# EAGLE board ME 433 round 2 (EAGLE 5.12)
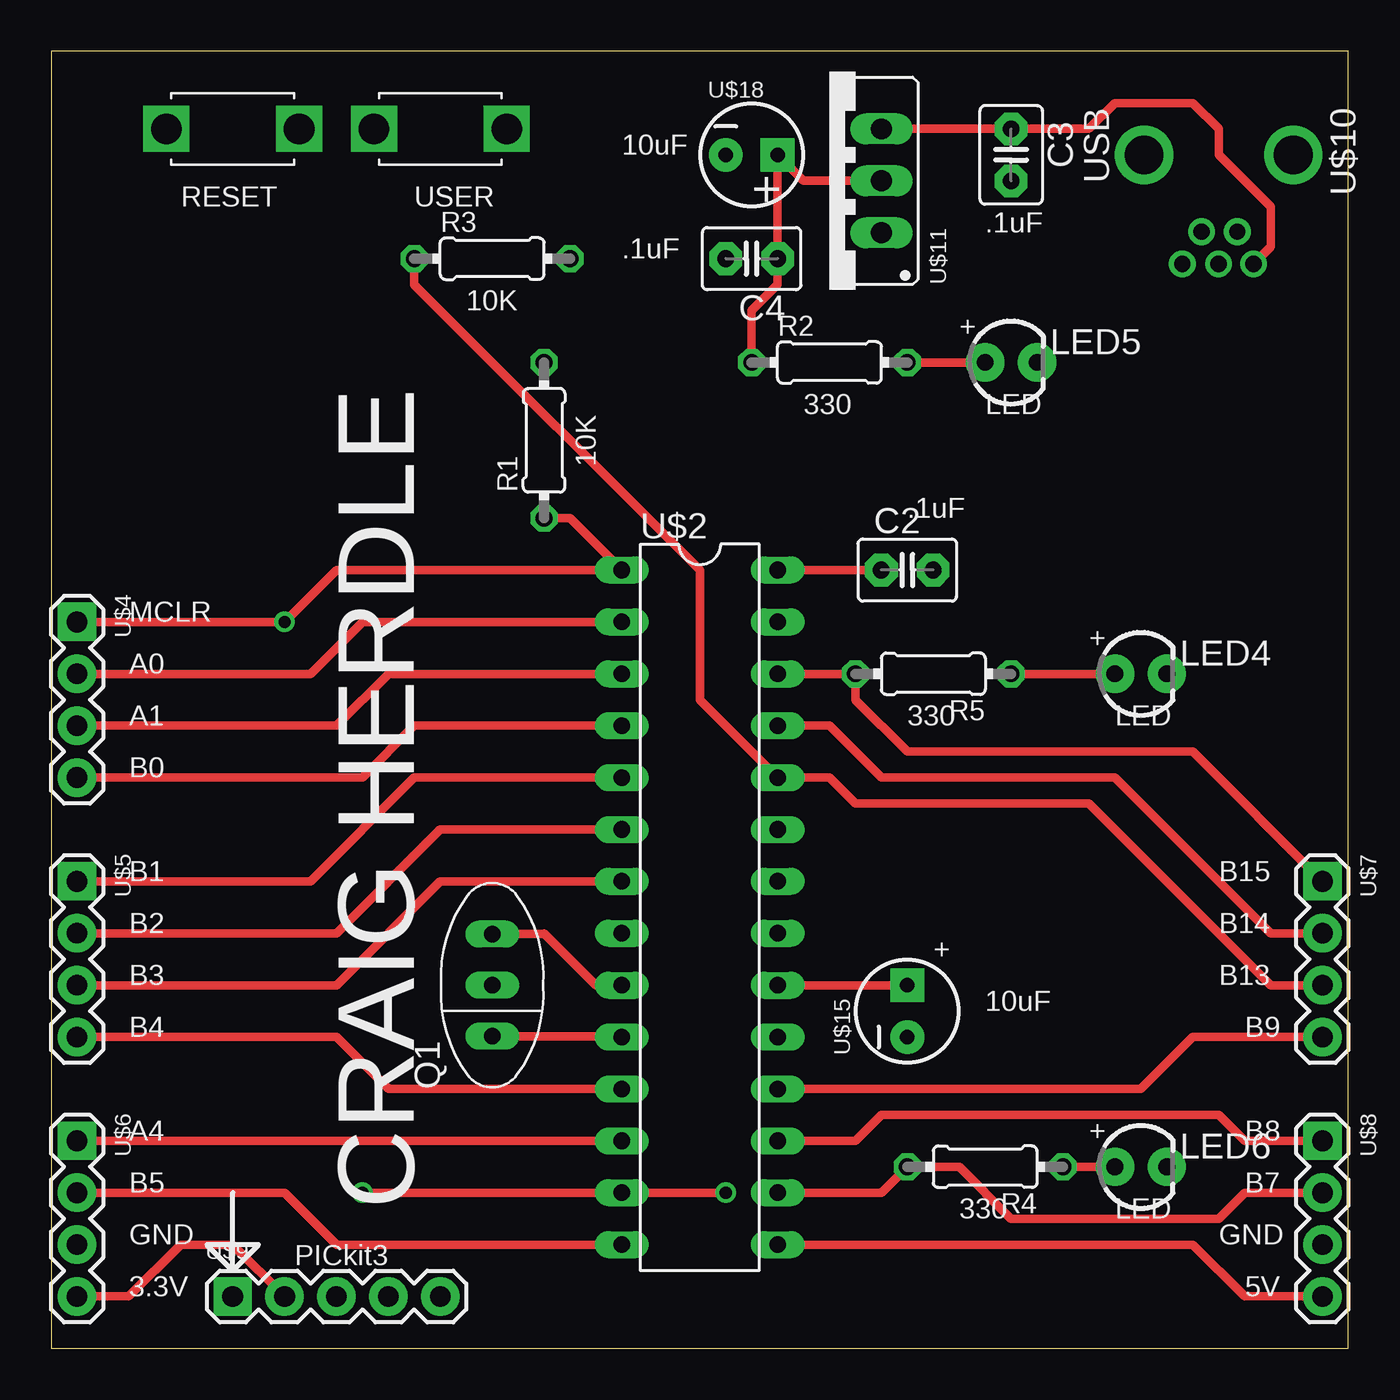
[diagram p0: board, top side]
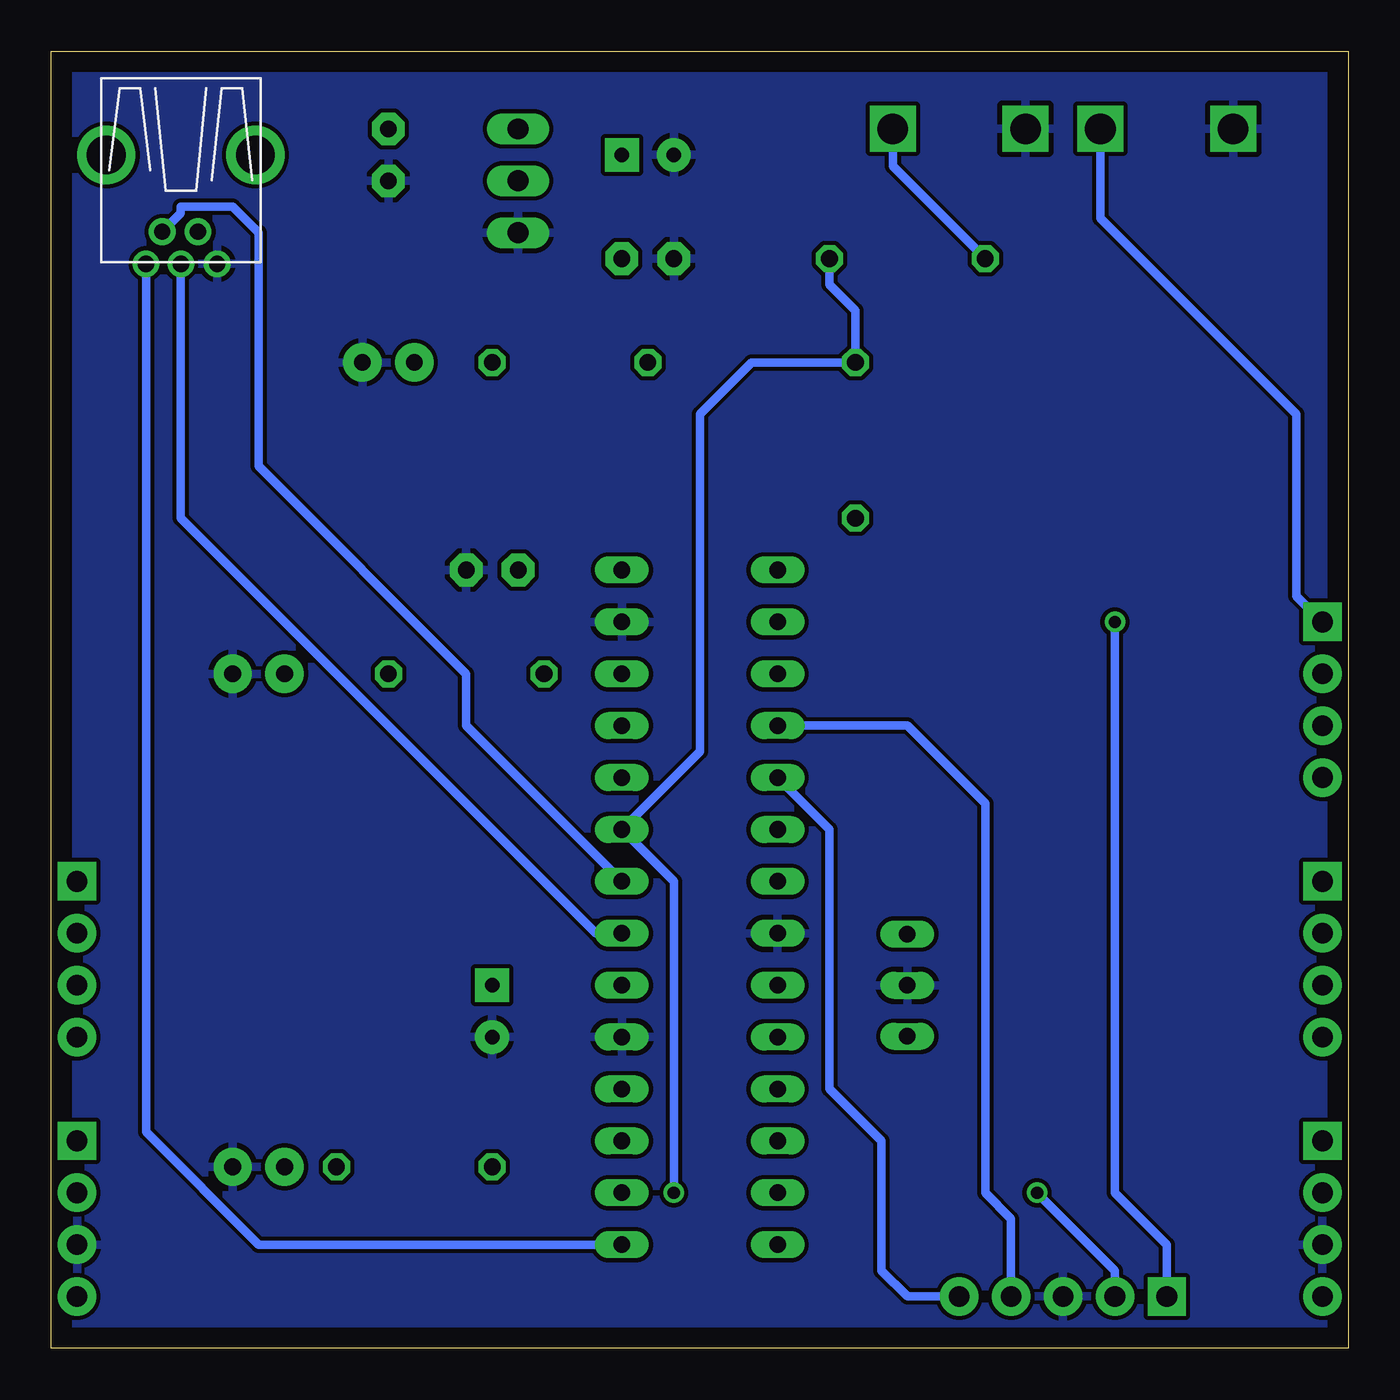
[diagram p1: board, bottom side, seen from below]

Size 63.5 x 63.5 mm. Coordinates in mm from the lower left corner, seen from the top.
Outline: 0,0 63.5,0 63.5,63.5 0,63.5 0,0
Copper layers (1*16): Top 0.035mm / dielectric 1.5mm / Bottom 0.035mm
Design rules "default": minimum track width 10mil, minimum drill 24mil, track to track 8mil, track to pad 8mil, pad to pad 8mil, via to via 8mil, smd to smd 8mil, copper to edge 40mil, drill to drill 8mil, minimum pad ring 10mil, minimum via ring 8mil, stop-mask expansion 4mil, vias tented up to drill 0mil, thermal gap 10mil

## Footprints (pad centres in the part's own frame; a part is rotated, then mirrored left to right if it is on the bottom)
C2.5-3 = drill 0.813 pad 1.6 octagon: 1 -1.27,0; 2 1.27,0
LED3MM = drill 0.813 pad 1.88 round: A -1.27,0; K 1.27,0
CSTLA_T = drill 0.813 long: 1 -2.5,0; 2 0,0; 3 2.5,0
0204/7 = drill 0.813 octagon: 1 -3.81,0; 2 3.81,0
DIL28-3 = drill 0.813 long: 1 -16.51,-3.81; 2 -13.97,-3.81; 3 -11.43,-3.81; 4 -8.89,-3.81; 5 -6.35,-3.81; 6 -3.81,-3.81; 7 -1.27,-3.81; 8 1.27,-3.81; 9 3.81,-3.81; 10 6.35,-3.81; 11 8.89,-3.81; 12 11.43,-3.81; 13 13.97,-3.81; 14 16.51,-3.81; 15 16.51,3.81; 16 13.97,3.81; 17 11.43,3.81; 18 8.89,3.81; 19 6.35,3.81; 20 3.81,3.81; 21 1.27,3.81; 22 -1.27,3.81; 23 -3.81,3.81; 24 -6.35,3.81; 25 -8.89,3.81; 26 -11.43,3.81; 27 -13.97,3.81; 28 -16.51,3.81
TACTILE_SWITCH = drill 1.5 square: 1 -3.25,0; 2 3.25,0
1X04 = drill 1.016 pad 1.88 square: 1 0,0 | drill 1.016 pad 1.88 round: 2 2.54,0; 3 5.08,0; 4 7.62,0
1X05 = drill 1.016 pad 1.88 square: 1 0,0 | drill 1.016 pad 1.88 round: 2 2.54,0; 3 5.08,0; 4 7.62,0; 5 10.16,0
USB-MINIB = drill 0.8 round: D+ 4.064,0; D- 2.489,0.914; GND 4.064,-1.778; ID 2.489,-0.838; VBUS 4.064,1.702 | drill 1.9 round: P$6 -1.27,-3.65; P$7 -1.27,3.65
TO220 = drill 1.016 long: 1 -2.54,0; 2 0,0; 3 2.54,0
CAP_POL_D = drill 0.7 pad 1.651 square: 1 1.27,0 | drill 0.7 pad 1.651 round: 2 -1.27,0

## Placement (x,y rotation side)
C2  .1uF  [C2.5-3]  41.91,38.1 0 top
C3  .1uF  [C2.5-3]  46.99,58.42 270 top
C4  .1uF  [C2.5-3]  34.29,53.34 180 top
LED4  [LED3MM]  53.34,33.02 0 top
LED5  [LED3MM]  46.99,48.26 0 top
LED6  [LED3MM]  53.34,8.89 0 top
Q1  [CSTLA_T]  21.59,17.78 90 top
R1  10K  [0204/7]  24.13,44.45 90 top
R2  [0204/7]  38.1,48.26 0 top
R3  10K  [0204/7]  21.59,53.34 0 top
R4  330  [0204/7]  45.72,8.89 180 top
R5  330  [0204/7]  43.18,33.02 180 top
U$2  PIC32MX250F128BPIC32MX250F128B  [DIL28-3]  31.75,21.59 270 top
U$3  TACTILE_SWITCH  [TACTILE_SWITCH]  8.89,59.69 0 top
U$4  1X04_HEADER  [1X04]  1.27,35.56 270 top
U$5  1X04_HEADER  [1X04]  1.27,22.86 270 top
U$6  1X04_HEADER  [1X04]  1.27,10.16 270 top
U$7  1X04_HEADER  [1X04]  62.23,22.86 270 top
U$8  1X04_HEADER  [1X04]  62.23,10.16 270 top
U$9  1X05_HEADER  [1X05]  8.89,2.54 0 top
U$10  USB  [USB-MINIB]  57.15,57.15 270 top
U$11  LD1117  [TO220]  40.64,57.15 90 top
U$12  TACTILE_SWITCH  [TACTILE_SWITCH]  19.05,59.69 0 top
U$15  10uF  [CAP_POL_D]  41.91,16.51 90 top
U$18  10uF  [CAP_POL_D]  34.29,58.42 0 top

## Library data of the parts
C2-C4 = capacitor-wima
LED4-LED6 = Gibbot v4
Q1 = murata-resonators
R1-R5 U$2 U$3 U$12 = CraigsFirstLibrary
U$4-U$11 U$15 U$18 = ME433 (1)

## Nets
3.3V: R1.2 R3.2 U$2.13 U$2.23 U$6.4 U$9.2
5V: C3.1 U$2.15 U$8.4 U$10.VBUS U$11.3
A0: U$2.2 U$4.2
A1: U$2.3 U$4.3
A4: U$2.12 U$6.1
B0: U$2.4 U$4.4 U$9.4
B1: U$2.5 U$5.1 U$9.5
B2: U$2.6 U$5.2
B3: U$2.7 U$5.3
B4: U$2.11 U$5.4
B5: U$2.14 U$6.2
B7: R4.2 U$2.16 U$8.2
B8: U$2.17 U$8.1
B9: U$2.18 U$7.4
B13: R3.1 U$2.24 U$7.3 U$12.2
B14: U$2.25 U$7.2
B15: R5.2 U$2.26 U$7.1
D+: U$2.21 U$10.D+
D-: U$2.22 U$10.D-
GND: C2.2 C3.2 C4.2 LED4.K LED5.K LED6.K Q1.2 U$2.8 U$2.19 U$2.27 U$3.1 U$6.3 U$8.3 U$9.3 U$10.GND U$11.1 U$12.1 U$15.2 U$18.2
MCLR: R1.1 U$2.1 U$3.2 U$4.1 U$9.1
N$1: LED5.A R2.2
N$2: LED4.A R5.1
N$3: LED6.A R4.1
N$14: C2.1 U$2.28
N$22: U$2.20 U$15.1
N$57: C4.1 R2.1 U$11.2 U$18.1
OSC1: Q1.3 U$2.9
OSC2: Q1.1 U$2.10

## Tracks (layer width: path | path; a pad name or v marks a point on that pad's centre or on a via)
3.3V  (via drill 0.6)
  Top 0.406: U$6.4 3.81,2.54 6.35,5.08 8.89,5.08 U$9.2 | v15.24,7.62 U$2.13 v33.02,7.62
  Bottom 0.406: U$9.2 11.43,3.81 v15.24,7.62 | v33.02,7.62 33.02,22.86 U$2.23 31.75,29.21 31.75,45.72 29.21,48.26 R1.2 24.13,50.8 25.4,52.07 R3.2
5V
  Top 0.406: U$2.15 55.88,5.08 58.42,2.54 U$8.4 | U$11.3 C3.1 50.8,59.69 52.07,60.96 55.88,60.96 57.15,59.69 57.15,58.42 59.69,55.88 59.69,53.92 U$10.VBUS
  Bottom 0.406: U$10.VBUS 58.85,10.59 53.34,5.08 U$2.15
A0
  Top 0.406: U$2.2 15.24,35.56 12.7,33.02 U$4.2
A1
  Top 0.406: U$2.3 16.51,33.02 13.97,30.48 U$4.3
A4
  Top 0.406: U$6.1 U$2.12
B0
  Top 0.406: U$4.4 15.24,27.94 17.78,30.48 U$2.4
  Bottom 0.406: U$9.4 16.51,6.35 17.78,7.62 17.78,26.67 21.59,30.48 U$2.4
B1
  Top 0.406: U$2.5 17.78,27.94 12.7,22.86 U$5.1
  Bottom 0.406: U$9.5 21.59,2.54 22.86,3.81 22.86,10.16 25.4,12.7 25.4,25.4 U$2.5
B2
  Top 0.406: U$5.2 13.97,20.32 19.05,25.4 U$2.6
B3
  Top 0.406: U$5.3 13.97,17.78 19.05,22.86 U$2.7
B4
  Top 0.406: U$5.4 13.97,15.24 16.51,12.7 U$2.11
B5
  Top 0.406: U$6.2 11.43,7.62 13.97,5.08 U$2.14
B7
  Top 0.406: U$2.16 40.64,7.62 R4.2 44.45,8.89 46.99,6.35 57.15,6.35 58.42,7.62 U$8.2
B8
  Top 0.406: U$2.17 39.37,10.16 40.64,11.43 57.15,11.43 58.42,10.16 U$8.1
B9
  Top 0.406: U$2.18 53.34,12.7 55.88,15.24 U$7.4
B13
  Top 0.406: U$7.3 59.69,17.78 50.8,26.67 39.37,26.67 38.1,27.94 U$2.24 31.75,31.75 31.75,38.1 17.78,52.07 R3.1
  Bottom 0.406: U$12.2 22.3,57.86 R3.1
B14
  Top 0.406: U$2.25 38.1,30.48 40.64,27.94 52.07,27.94 59.69,20.32 U$7.2
B15
  Top 0.406: U$2.26 R5.2 39.37,31.75 41.91,29.21 55.88,29.21 U$7.1
D+
  Bottom 0.406: U$2.21 36.83,20.32 57.15,40.64 U$10.D+
D-
  Bottom 0.406: U$2.22 43.18,30.48 43.18,33.02 53.34,43.18 53.34,54.61 54.61,55.88 57.15,55.88 57.15,55.58 U$10.D-
GND
  pour Bottom: -2.54,66.04 68.58,66.04 68.58,-2.54 -2.54,-2.54
MCLR  (via drill 0.6)
  Top 0.406: U$4.1 v11.43,35.56 13.97,38.1 U$2.1 25.4,40.64 R1.1
  Bottom 0.406: U$9.1 8.89,5.08 11.43,7.62 v11.43,35.56 | U$3.2 12.14,55.32 2.54,45.72 2.54,36.83 U$4.1
N$1
  Top 0.406: R2.2 LED5.A
N$2
  Top 0.406: R5.1 LED4.A
N$3
  Top 0.406: R4.1 LED6.A
N$14
  Top 0.406: U$2.28 C2.1
N$22
  Top 0.406: U$2.20 U$15.1
N$57
  Top 0.406: U$11.2 36.83,57.15 U$18.1 C4.1 35.56,52.07 34.29,50.8 R2.1
OSC1
  Top 0.406: Q1.3 24.09,20.28 24.13,20.32 26.67,17.78 U$2.9
OSC2
  Top 0.406: Q1.1 27.9,15.28 U$2.10

## Text on the board
tPlace: 10uF | RESET | USER | + | .1uF | .1uF | 10K | + | CRAIG HERDLE | 330 | LED | 10K | .1uF | MCLR | + | A0 | A1 | 330 | LED | B0 | B1 | B15 | B2 | B14 | + | B3 | B13 | 10uF | B4 | B9 | A4 | + | B8 | B5 | B7 | 330 | LED | GND | PICkit3 | GND | 3.3V | 5V